# Altium PCB PCB6.PcbDoc
Units mm, origin at the board's own origin, x right, y up, seen from the top; angles counter-clockwise.
Board outline 15.37 x 11.18 mm, 2 copper layers (Top Layer, Bottom Layer); 9 components, 6 nets, 20 pads, 4 vias.
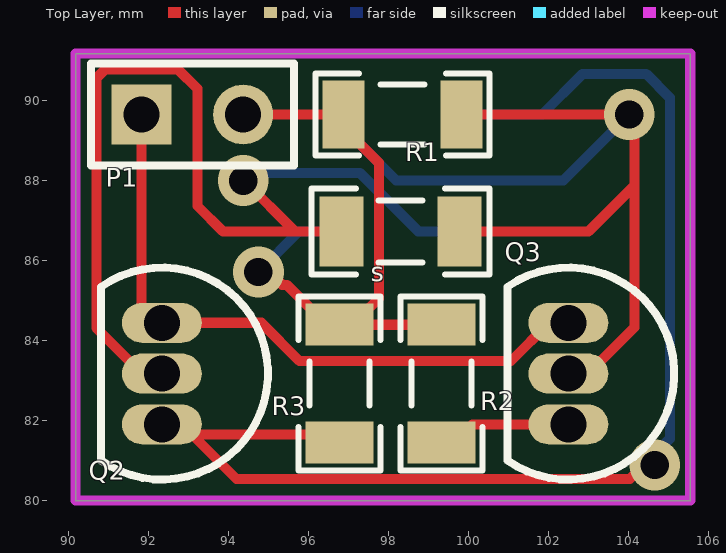
[diagram p0: Top Layer view]
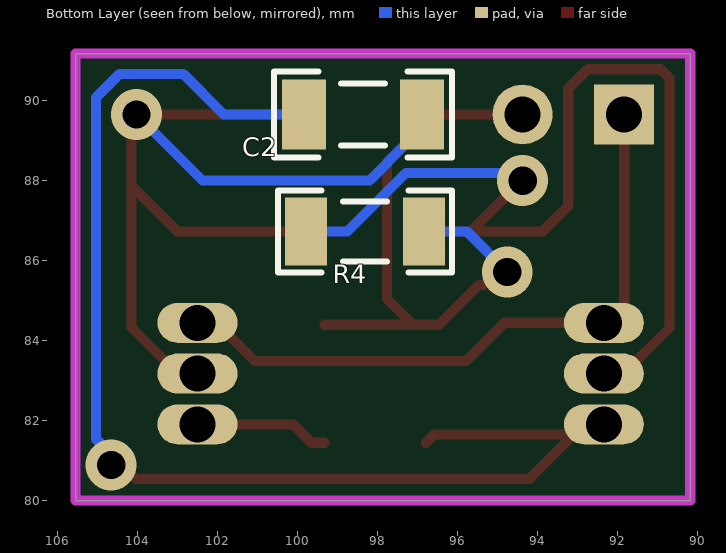
[diagram p1: Bottom Layer view, seen from below]
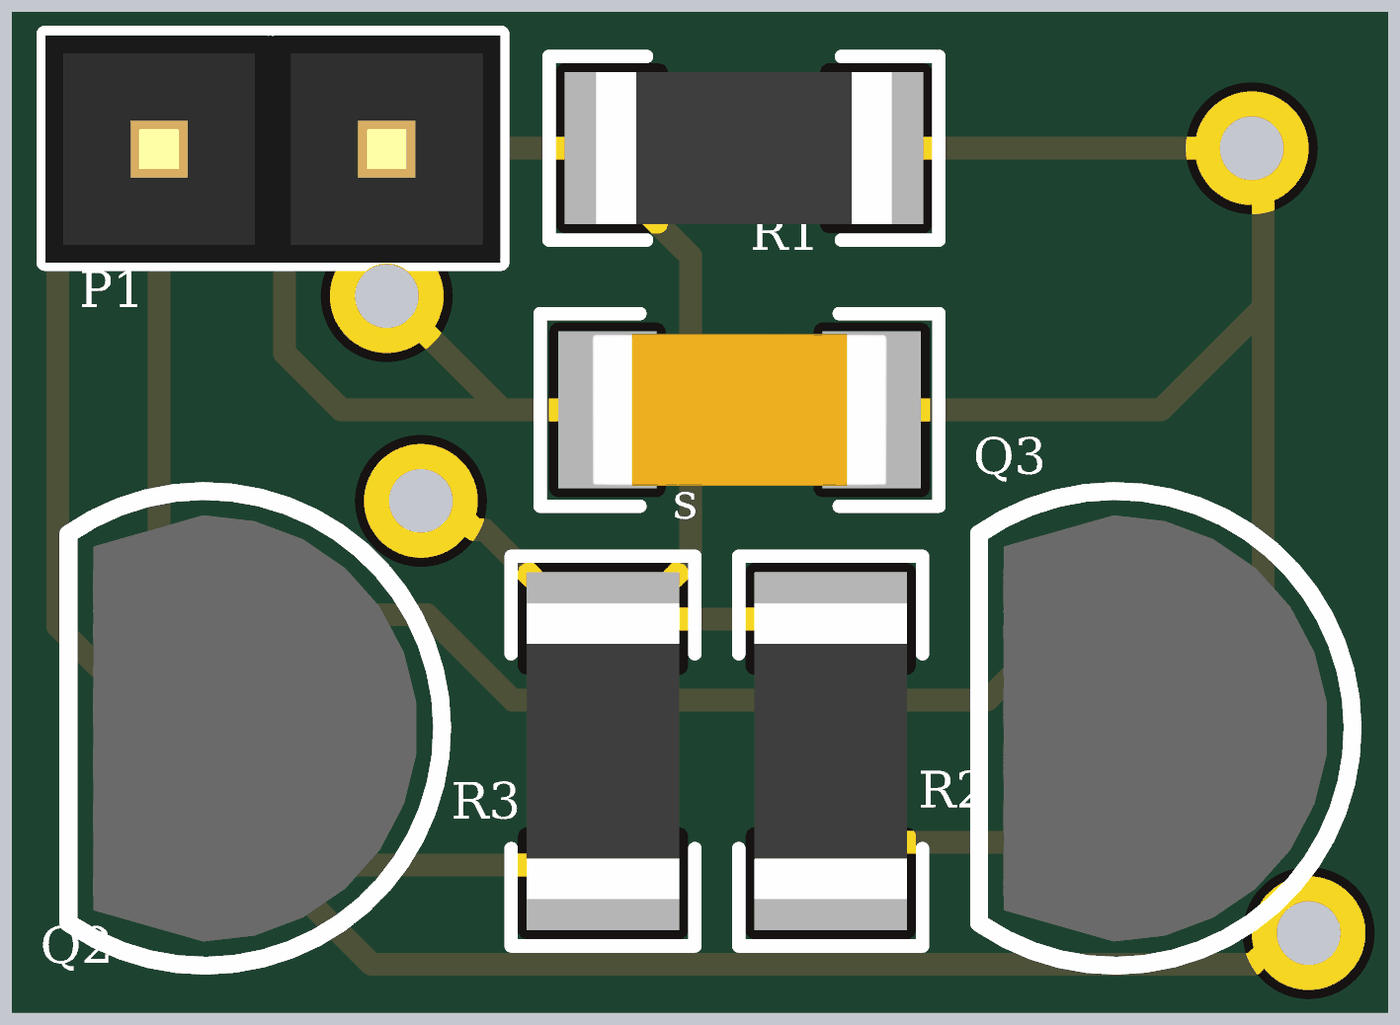
[diagram p2: 3D render of the assembled board from above, using the file's embedded part models]

## Layer stack, top to bottom
Top Solder: solder mask 0.0102, Solder Resist, Dk 3.5
Top Layer: signal copper 0.0356
Dielectric 1: dielectric 0.32, FR-4, Dk 4.8
Bottom Layer: signal copper 0.0356
Bottom Solder: solder mask 0.0102, Solder Resist, Dk 3.5

## Board outline
90.17,80.01 90.17,91.186 105.537,91.186 105.537,80.01

## Design rules (kind name [scope] priority, off if disabled: settings)
Clearance [All] p1: gap=0.254 ignorepadtopadclearanceinfootprint=FALSE except(0: Arc-Hole Track-Hole SMDPad-Hole THPad-Hole Via-Hole Fill-Hole Poly-Hole Region-Hole Text-Hole)
PolygonConnect [All] p1: connectstyle=Relief reliefconductorwidth=0.254 reliefentries=4 polygonreliefangle="90 Angle" airgapwidth=0.254
RoutingVias [All] p1: holewidth=0.711 width=1.27 viastyle="Through Hole" minholewidth=0.711 minwidth=1.27 maxholewidth=0.711 maxwidth=1.27
SolderMaskExpansion [All] p1: expansion=0.102 istentingtop=FALSE
Width [All] p1: maxlimit=0.254 minlimit=0.254 preferedwidth=0.254
30 further rules are at their usual default settings.

## Components (designator, comment, footprint, x,y, rotation, side; value= is the part's Value field where it differs from the comment)
C2 "22nF" CAP1206 98.347,89.662 r0 bottom value=100nF
P1 "Header 2" HDR1X2 91.821,89.662 r0 top
Q2 "2N3904" 2N3904 92.329,84.455 r270 top
Q3 "2N3904" 2N3904 102.489,84.455 r270 top
R1 "100K" RES1206 98.347,89.662 r180 top
R2 "1K" RES1206 99.314,82.931 r90 top
R3 "1K" RES1206 96.774,82.931 r90 top
R4 "100K" RES1206 98.298,86.741 r180 bottom
s "22nF" CAP1206 98.298,86.741 r180 top value=100nF (schematic designator C1)

## Footprints (in the part's own frame and the unit in brackets; to place one, negate y for a bottom-side part, rotate by r counter-clockwise, add the part's x,y. Pads: shape width x height; smd on the part's side, far side on the other; paste and mask are expansions set on the pad)
2N3904 [mm] "NPN Transistor Small Signal"
  oval 1x2 hole 0.9: 1(0,0) 2(1.27,0) 3(2.54,0)
  silkscreen extent -1.38,-1.52 3.92,2.65, body extent -1.11,-1.25 3.65,2.38, height 17.82
CAP1206 [mm] "Chip Capacitor, 2-Leads, Body 3/20x1/60mm, IPC Medium Density DESIGNER:ABBAS BASEREH"
  rect 1.1x1.75 smd: 1(-1.475,0) 2(1.475,0)
  silkscreen extent -2.22,-1.07 2.22,1.07, body extent -1.65,-0.85 1.65,0.85, height 0.94
HDR1X2 [mm] "Connector; Header; 2 Position"
  rect 1.5x1.5 hole 0.9: 1(0,0)
  round 1.5 hole 0.9: 2(2.54,0)
  silkscreen extent -1.27,-1.27 3.81,1.27, body extent -1.27,-1.28 3.81,1.26, height 8.79
RES1206 [mm] "Chip Resistor, 2-Leads, Body 3/20x1/60mm, IPC Medium Density DESIGNER:ABBAS BASEREH"
  rect 1.05x1.7 smd: 1(-1.475,0) 2(1.475,0)
  silkscreen extent -2.17,-1.02 2.17,1.02, body extent -1.65,-0.85 1.65,0.85, height 0.94

## Part data
C2 s: library part "CAP SMD PACKAGE", "TOTAL CAPACITOR SMD PACK", Data=2017-3-10, Desc.="CAP SMD TOTAL PACKAGES", Designer="Abbas Basereh"
P1: "Header, 2-Pin", LatestRevisionDate=17-Jul-2002, LatestRevisionNote="Re-released for DXP Platform.", Publisher="Altium Limited"
Q2 Q3: "NPN Transistor"
R1 R2 R3 R4: library part "RES SMD PACKAGE", "TOTAL SMD RESISTOR PACK", Data=2017-3-10, Desc.="RES SMD PAKAGES", Designer="Abbas Basereh"

## Via types
v1: diameter 1.27, hole 0.711, Top Layer to Bottom Layer, 4 vias

## Nets (pads, with @x,y where several pads share a name; then routed paths per layer and width w, separated by ;. In a path a pad name is that pad's centre, name@x,y a point inside that pad or via, vN(x,y) a via of type N, cw(c..) or ccw(c..) an arc to the next point about the centre after c; other vN are vias at no path point)
GND: P1.1 Q2.1 Q3.1 | length 16.5
  Top Layer w0.254: P1.1 91.821,84.8 92.166,84.455 Q2.1 94.811,84.455 95.766,83.5 101.058,83.5 102.013,84.455 Q3.1
NetC1_1: C2.1 Q3.2 R1.1 s.1 | length 25.2
  Top Layer w0.254: s.1 102.997,86.741 104.14,87.884 ; R1.1 v1(104.013,89.662) 104.14,89.535 104.14,87.884 ; Q3.2 102.989,83.185 104.14,84.336 104.14,87.884
  Bottom Layer w0.254: C2.1 96.872,89.337 97.74,88.469 97.74,88.456 98.185,88.011 102.362,88.011 v1(104.013,89.662)
NetC1_2: Q2.2 R4.1 s.2 | length 25.9
  Top Layer w0.254: Q2.2 91.829,83.185 90.69,84.324 90.69,90.57 90.913,90.793 92.729,90.793 93.218,90.304 93.218,87.376 93.853,86.741 95.652,86.741 ; v1(94.361,88.011) 94.382,88.011 95.652,86.741 ; s.2 95.652,86.741
  Bottom Layer w0.254: v1(94.361,88.011) 94.552,88.202 97.276,88.202 98.737,86.741 R4.1
NetC2_2: C2.2 Q2.3 R3.1 | length 32.9
  Top Layer w0.254: R3.1 96.569,81.661 Q2.3@93.083,81.661 ; v1(104.648,80.899) 104.373,80.899 104.024,80.55 94.194,80.55 Q2.3@93.083,81.661 ; Q2.3@92.829,81.915 Q2.3 Q2.3@92.829,81.915 ; Q2.3@92.829,81.915 Q2.3@93.083,81.661 ; Q2.3@92.829,81.915 Q2.3@93.083,81.661
  Bottom Layer w0.254: C2.2 101.831,89.662 102.847,90.678 104.434,90.678 105.029,90.083 105.029,81.555 104.648,81.174 v1(104.648,80.899)
NetP1_2: P1.2 R1.2 R2.2 R3.2 R4.2 | length 16.1
  Top Layer w0.254: P1.2@94.488,89.154 94.996,89.662 R1.2 96.872,89.337 97.754,88.455 97.754,85.061 R3.2@97.099,84.406 ; v1(94.742,85.725) 95.017,85.725 95.338,85.404 95.451,85.404 96.449,84.406 R3.2 R3.2@97.099,84.406 ; R2.2 R3.2@97.099,84.406
  Bottom Layer w0.254: v1(94.742,85.725) 95.758,86.741 R4.2
NetQ3_3: Q3.3 R2.1 | length 3.4
  Top Layer w0.254: R2.1 99.639,81.456 100.098,81.915 Q3.3

## Keep-outs
Keep-Out Layer:
  the board outline again, w0.254